# Altium PCB PCB1.PcbDoc
Units mm, origin at the board's own origin, x right, y up, seen from the top; angles counter-clockwise.
Board outline 99.82 x 99.82 mm, 2 copper layers (Top Layer, Bottom Layer); 7 components, 6 nets, 20 pads, 0 vias.
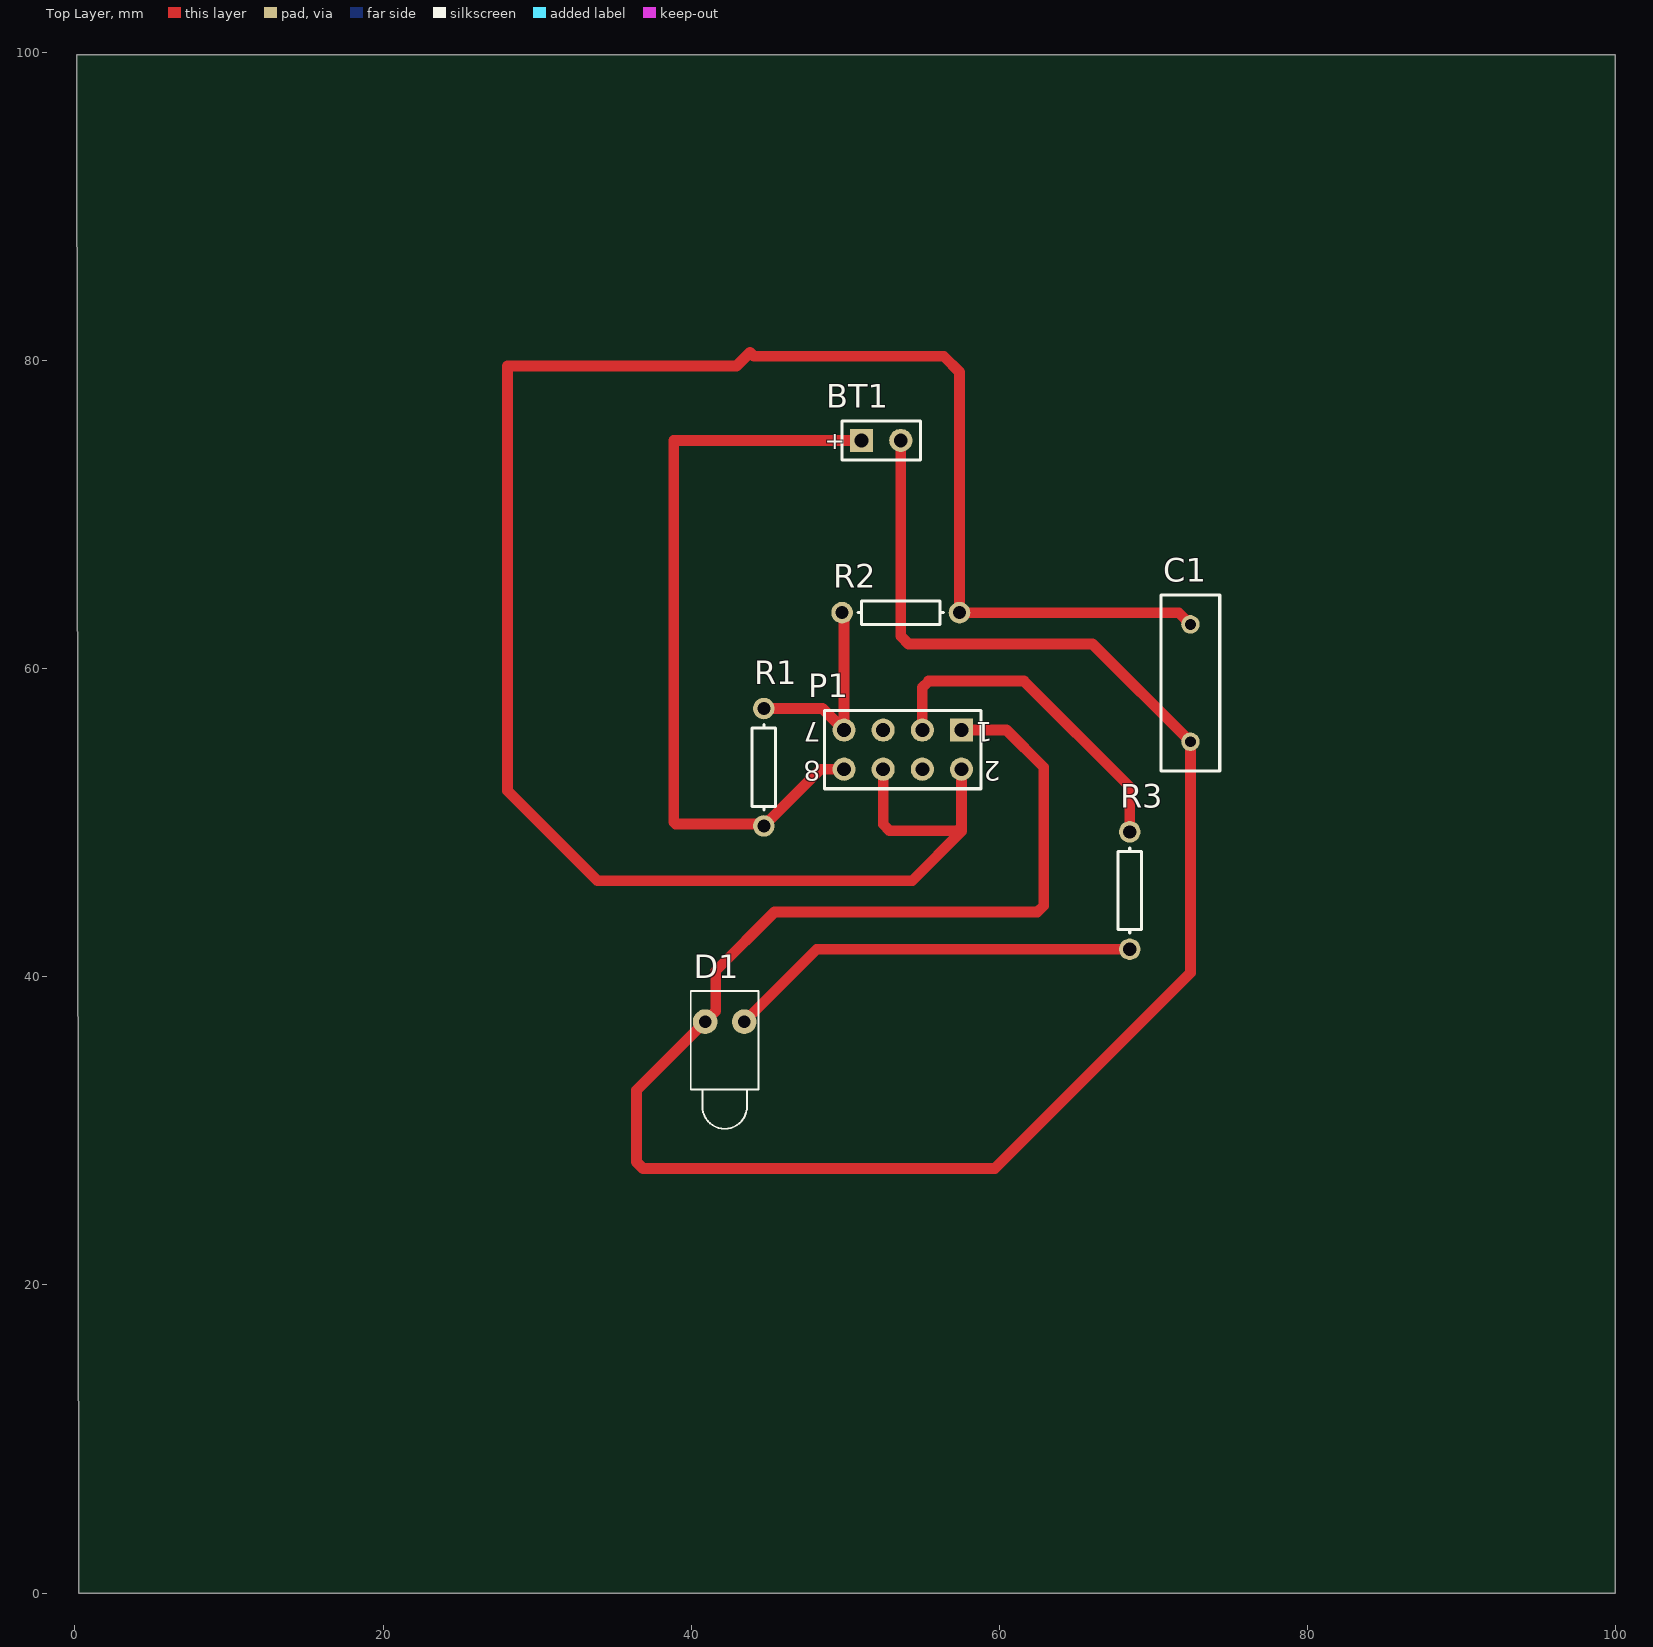
[diagram p0: Top Layer view]
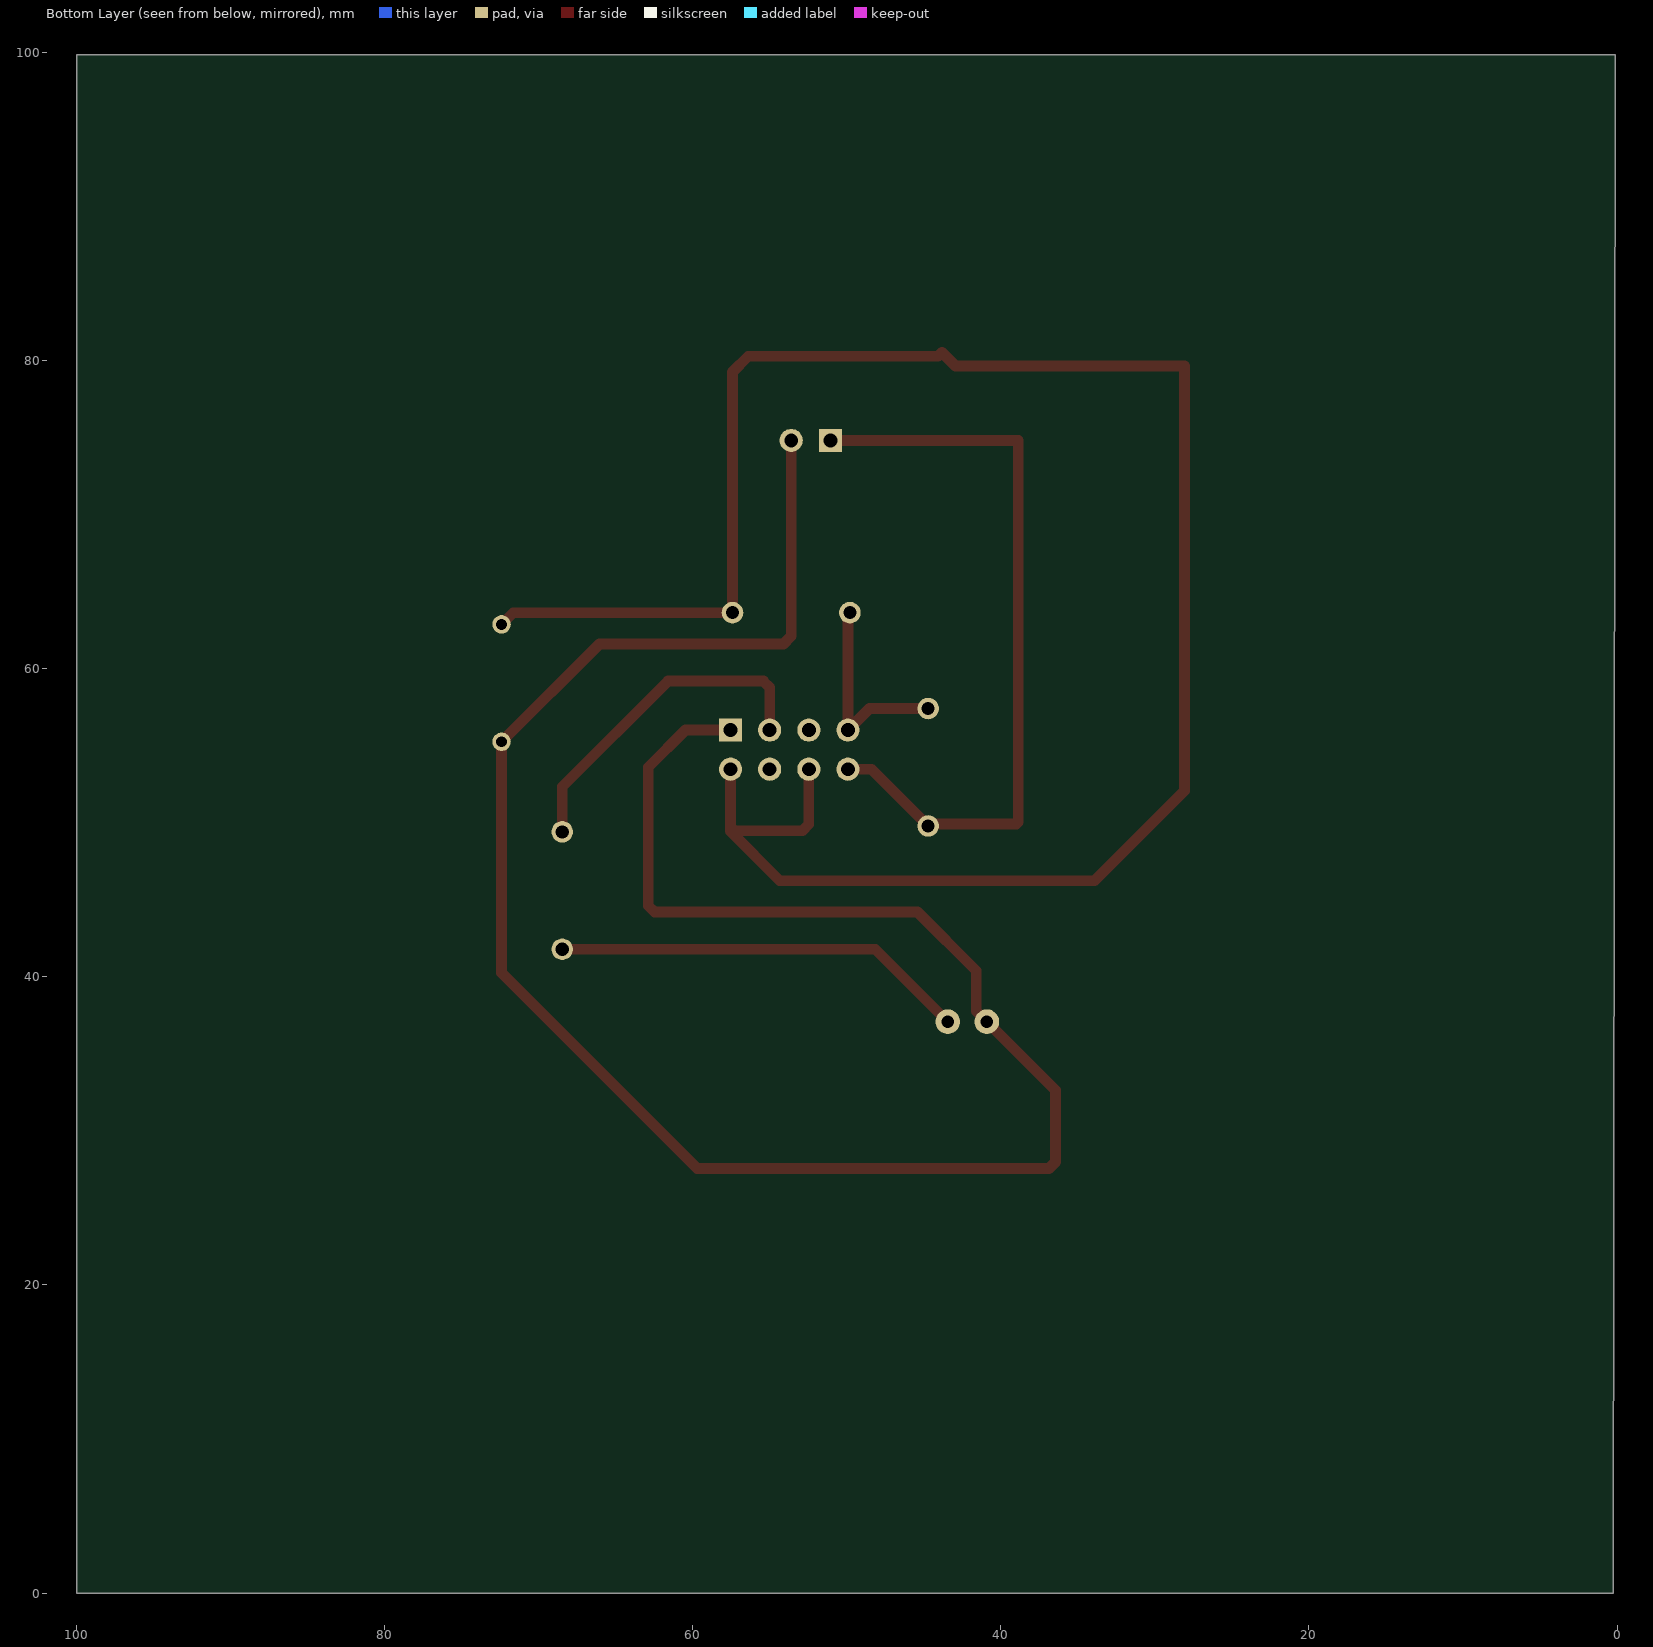
[diagram p1: Bottom Layer view, seen from below]

## Layer stack, top to bottom
Top Solder: solder mask 0.0102, Solder Resist, Dk 3.5
Top Layer: signal copper 0.0356
Dielectric 1: dielectric 0.32, FR-4, Dk 4.8
Bottom Layer: signal copper 0.0356
Bottom Solder: solder mask 0.0102, Solder Resist, Dk 3.5

## Board outline
0.254,0 99.949,0 99.949,99.822 0.127,99.822

## Design rules (kind name [scope] priority, off if disabled: settings)
Clearance [All] p1: gap=0.5 ignorepadtopadclearanceinfootprint=FALSE
PolygonConnect [All] p1: connectstyle=Relief reliefconductorwidth=0.254 reliefentries=4 polygonreliefangle="90 Angle" airgapwidth=0.254
RoomDefinition Sheet1 [InComponentClass('Sheet1')] p1: confinementstyle=ConfineIn formatcopy=TRUE lockcomponents=FALSE outline 0.762,0.762 99.441,0.762 99.441,98.933 0.762,98.933
RoutingVias [All] p1: holewidth=0.711 width=1.27 viastyle="Through Hole" minholewidth=0.711 minwidth=1.27 maxholewidth=0.711 maxwidth=1.27
SolderMaskExpansion [All] p1: expansion=0.102 istentingtop=FALSE
UnRoutedNet [All] p1: checkbadconnections=TRUE
Width [All] p1: maxlimit=0.77 minlimit=0.7 preferedwidth=0.7
29 further rules are at their usual default settings.

## Components (designator, comment, footprint, x,y, rotation, side; value= is the part's Value field where it differs from the comment)
BT1 "9V" BAT-2 52.324,74.803 r0 top
C1 "Cap" RAD-0.3 72.39,59.055 r270 top value=10uF
D1 "LED1" LED-1 42.164,37.084 r270 top
P1 "Header 4X2" HDR2X4 57.531,56.007 r180 top
R1 "Res1" AXIAL-0.3 44.704,53.594 r90 top value=1K
R2 "Res1" AXIAL-0.3 53.594,63.627 r0 top value=10K
R3 "Res1" AXIAL-0.3 68.453,45.593 r90 top value=1K

## Footprints (in the part's own frame and the unit in brackets; to place one, negate y for a bottom-side part, rotate by r counter-clockwise, add the part's x,y. Pads: shape width x height; smd on the part's side, far side on the other; paste and mask are expansions set on the pad)
AXIAL-0.3 [mm] "Axial Device, Thru-Hole; 2 Leads; 0.3 in Pin Spacing"
  round 1.4 hole 0.85: 1(-3.81,0) 2(3.81,0)
  silkscreen extent -2.77,-0.76 2.77,0.76
BAT-2 [mm] "Battery; 2 Leads"
  rect 1.5x1.5 hole 0.9: 1(-1.27,0)
  round 1.5 hole 0.9: 2(1.27,0)
  silkscreen extent -2.54,-1.27 2.54,1.27
HDR2X4 [mm] "Connector; Header; 4x2 Position"
  rect 1.5x1.5 hole 0.9: 1(0,0)
  round 1.5 hole 0.9: 2(0,2.54) 3(2.54,0) 4(2.54,2.54) 5(5.08,0) 6(5.08,2.54) 7(7.62,0) 8(7.62,2.54)
  silkscreen extent -1.27,-1.27 8.89,3.81
LED-1 [mm] "LED; 2 Leads"
  round 1.6 hole 0.8: 1(0,1.27) 2(0,-1.27)
  silkscreen extent -2,-2.2 6.95,2.2
RAD-0.3 [mm] "Radial Cap, Thru-Hole; 2 Leads; 0.3 in Pin Spacing"
  round 1.2 hole 0.7: 1(-3.81,0) 2(3.81,0)
  silkscreen extent -5.71,-1.91 5.71,1.91

## Part data
BT1: library part Battery, "Multicell Battery", LatestRevisionDate=17-Jul-2002, LatestRevisionNote="Re-released for DXP Platform.", PackageDescription="Battery; 2 Leads", PackageReference=BAT-2, Published=24-Mar-1999, Publisher="Altium Limited"
C1: "Capacitor", LatestRevisionDate=17-Jul-2002, LatestRevisionNote="Re-released for DXP Platform.", PackageDescription="Radial Cap, Thru-Hole; 2 Leads; 0.3 in Pin Spacing", PackageReference=RAD-0.3, Published=8-Jun-2000, Publisher="Altium Limited"
D1: "Typical RED GaAs LED", LatestRevisionDate=08-Jul-2005, LatestRevisionNote="Mech Layer 1 removed.", PackageDescription="LED; 2 Leads", PackageReference=LED-1, Published=8-Jun-2000, Publisher="Altium Limited"
P1: "Header, 4-Pin, Dual row", LatestRevisionDate=17-Jul-2002, LatestRevisionNote="Re-released for DXP Platform.", Publisher="Altium Limited"
R1 R2 R3: "Resistor", LatestRevisionDate=17-Jul-2002, LatestRevisionNote="Re-released for DXP Platform.", PackageDescription="Axial Device, Thru-Hole; 2 Leads; 0.3 in Pin Spacing", PackageReference=AXIAL-0.3, Published=8-Jun-2000, Publisher="Altium Limited"

## Nets (pads, with @x,y where several pads share a name; then routed paths per layer and width w, separated by ;. In a path a pad name is that pad's centre, name@x,y a point inside that pad or via, vN(x,y) a via of type N, cw(c..) or ccw(c..) an arc to the next point about the centre after c; other vN are vias at no path point)
NetBT1_1: BT1.1 P1.8 R1.1 | length 49.6
  Top Layer w0.7: P1.8 48.387,53.467 R1.1 44.577,49.911 38.989,49.911 38.862,50.038 38.862,74.803 BT1.1
NetBT1_2: BT1.2 C1.2 D1.2 P1.1 | length 143.6
  Top Layer w0.7: BT1.2 53.594,62.103 54.102,61.595 66.04,61.595 C1.2 72.39,40.259 59.69,27.559 36.859,27.559 36.449,27.969 36.449,32.639 D1.2 41.584,37.774 41.584,40.39 45.39,44.196 62.455,44.196 62.865,44.606 62.865,53.594 60.452,56.007 P1.1
NetC1_1: C1.1 P1.2 P1.6 R2.2 | length 135.2
  Top Layer w0.7: P1.6 52.451,49.889 52.861,49.479 57.277,49.479 57.531,49.733 57.531,50.038 ; P1.2 57.531,50.038 ; C1.1 71.628,63.627 R2.2 57.404,79.248 56.388,80.264 44.069,80.264 43.815,80.518 42.926,79.629 28.067,79.629 28.067,52.07 33.909,46.228 54.331,46.228 57.556,49.454 57.556,50.013 57.531,50.038
NetD1_1: D1.1 R3.1 | length 27
  Top Layer w0.7: D1.1 48.133,41.783 R3.1
NetP1_3: P1.3 R3.2 | length 22.2
  Top Layer w0.7: P1.3 54.991,58.772 55.401,59.182 61.595,59.182 68.453,52.324 R3.2
NetP1_7: P1.7 R1.2 R2.1 | length 13.5
  Top Layer w0.7: R1.2 48.514,57.404 P1.7 49.911,63.5 R2.1
pads on no net: P1.4 P1.5

## Text inside footprints (layer, text, board x,y; h text height)
BT1: Top Overlay "+" at 48.654,74.226 h1.15
P1: Top Overlay "2" at 60.071,53.975 h1.27 r180; Top Overlay "1" at 59.563,56.515 h1.27 r180; Top Overlay "7" at 48.387,56.515 h1.27 r180; Top Overlay "8" at 48.387,53.975 h1.27 r180